# Altium PCB MAX96717_COUPON_V2.PcbDoc
Units mm, origin at the board's own origin, x right, y up, seen from the top; angles counter-clockwise.
Board outline 43 x 42 mm, 4 copper layers (Top Layer, Layer 1, Layer 2, Bottom Layer), stack 1.586 mm thick; 67 components, 47 nets, 220 pads, 89 vias.
Unrouted connection lines stored in the file: 6.
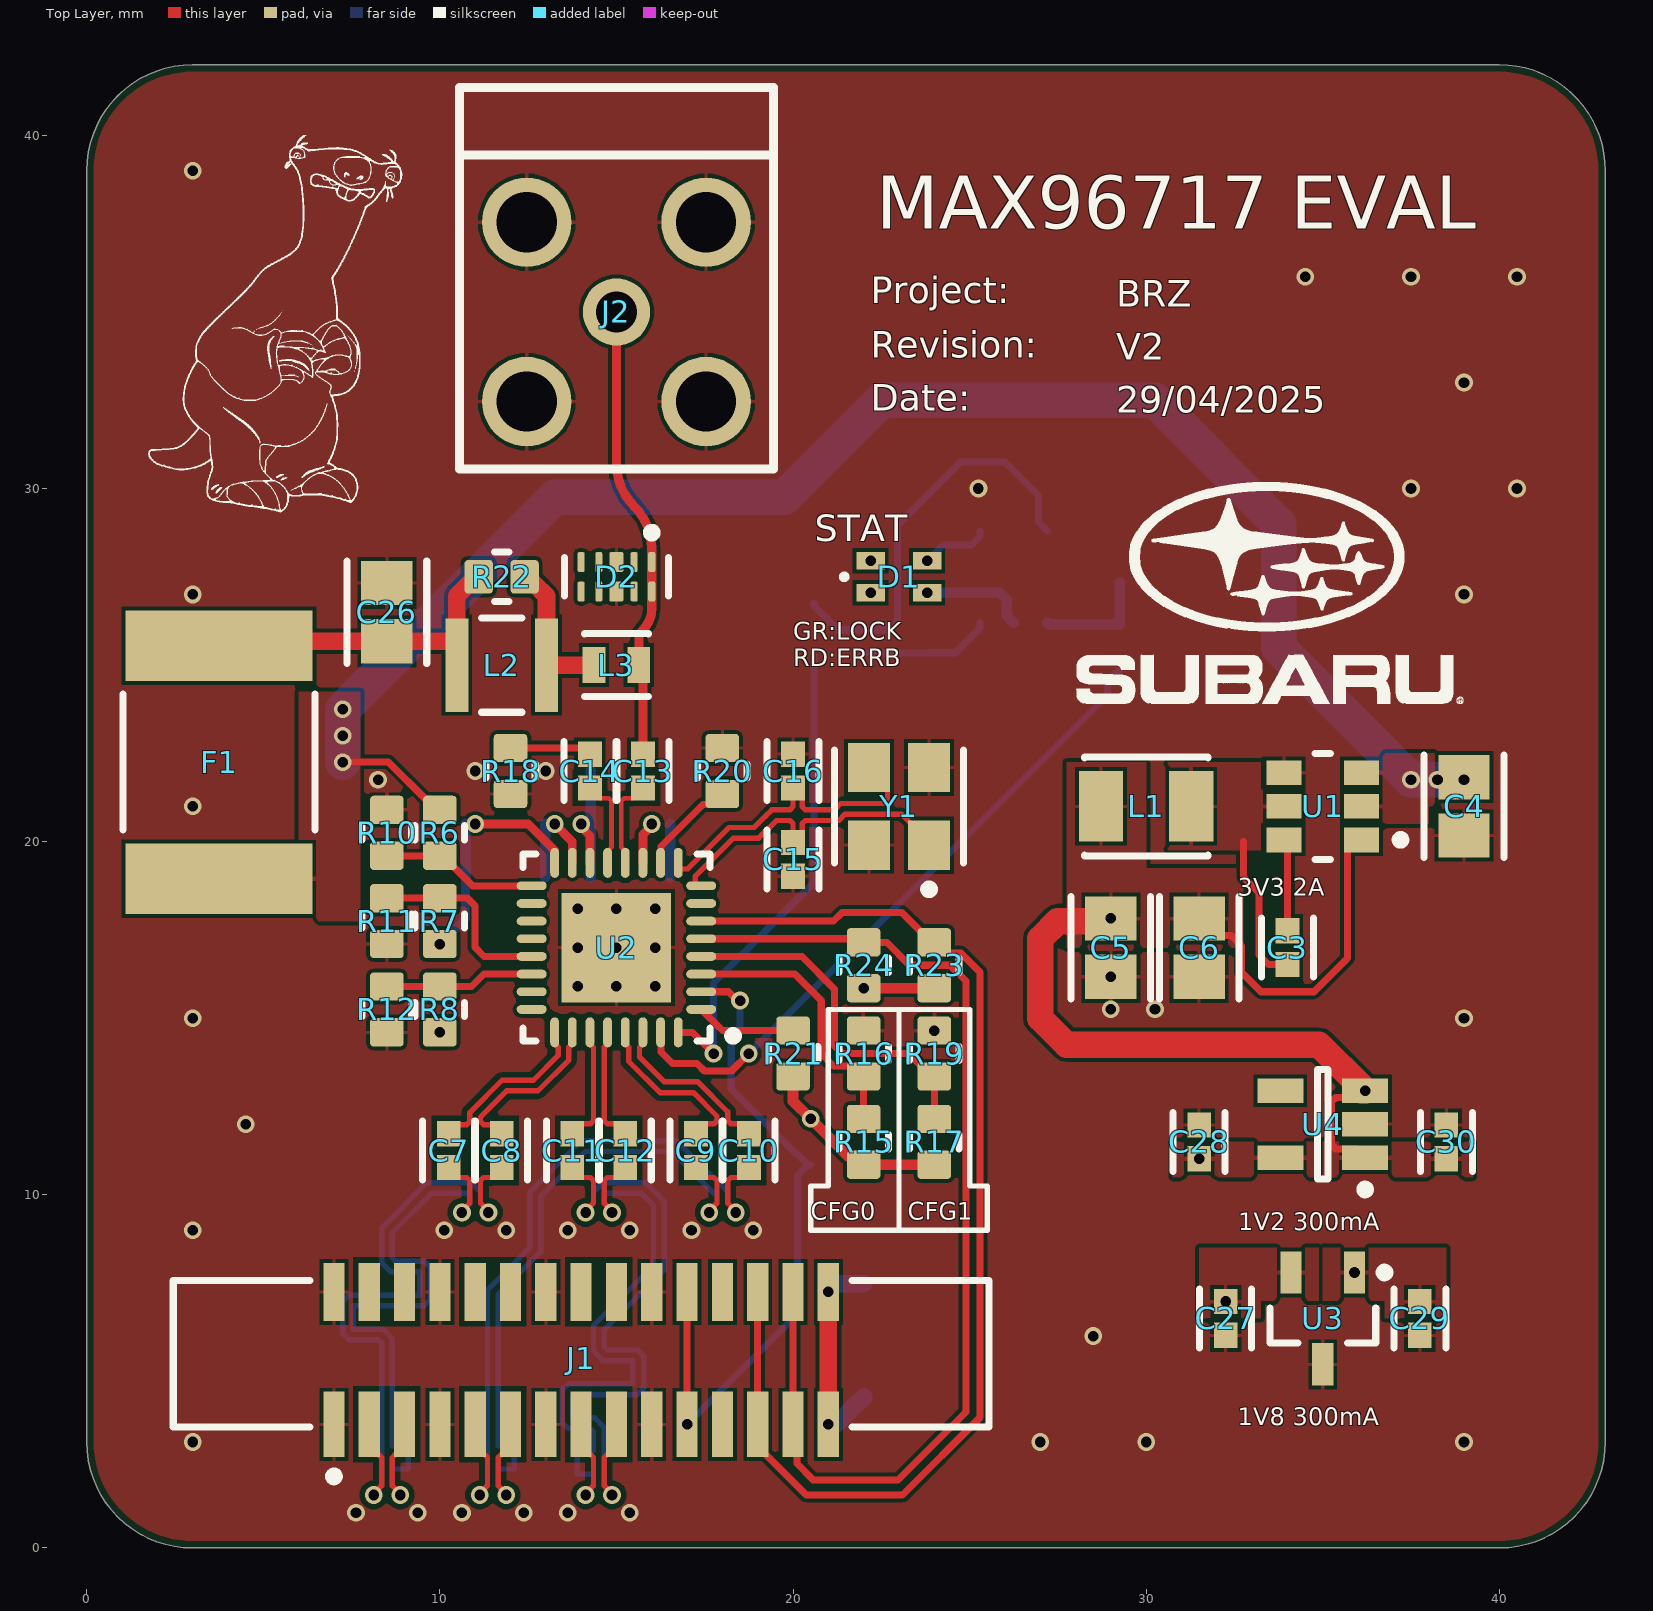
[diagram p0: Top Layer view]
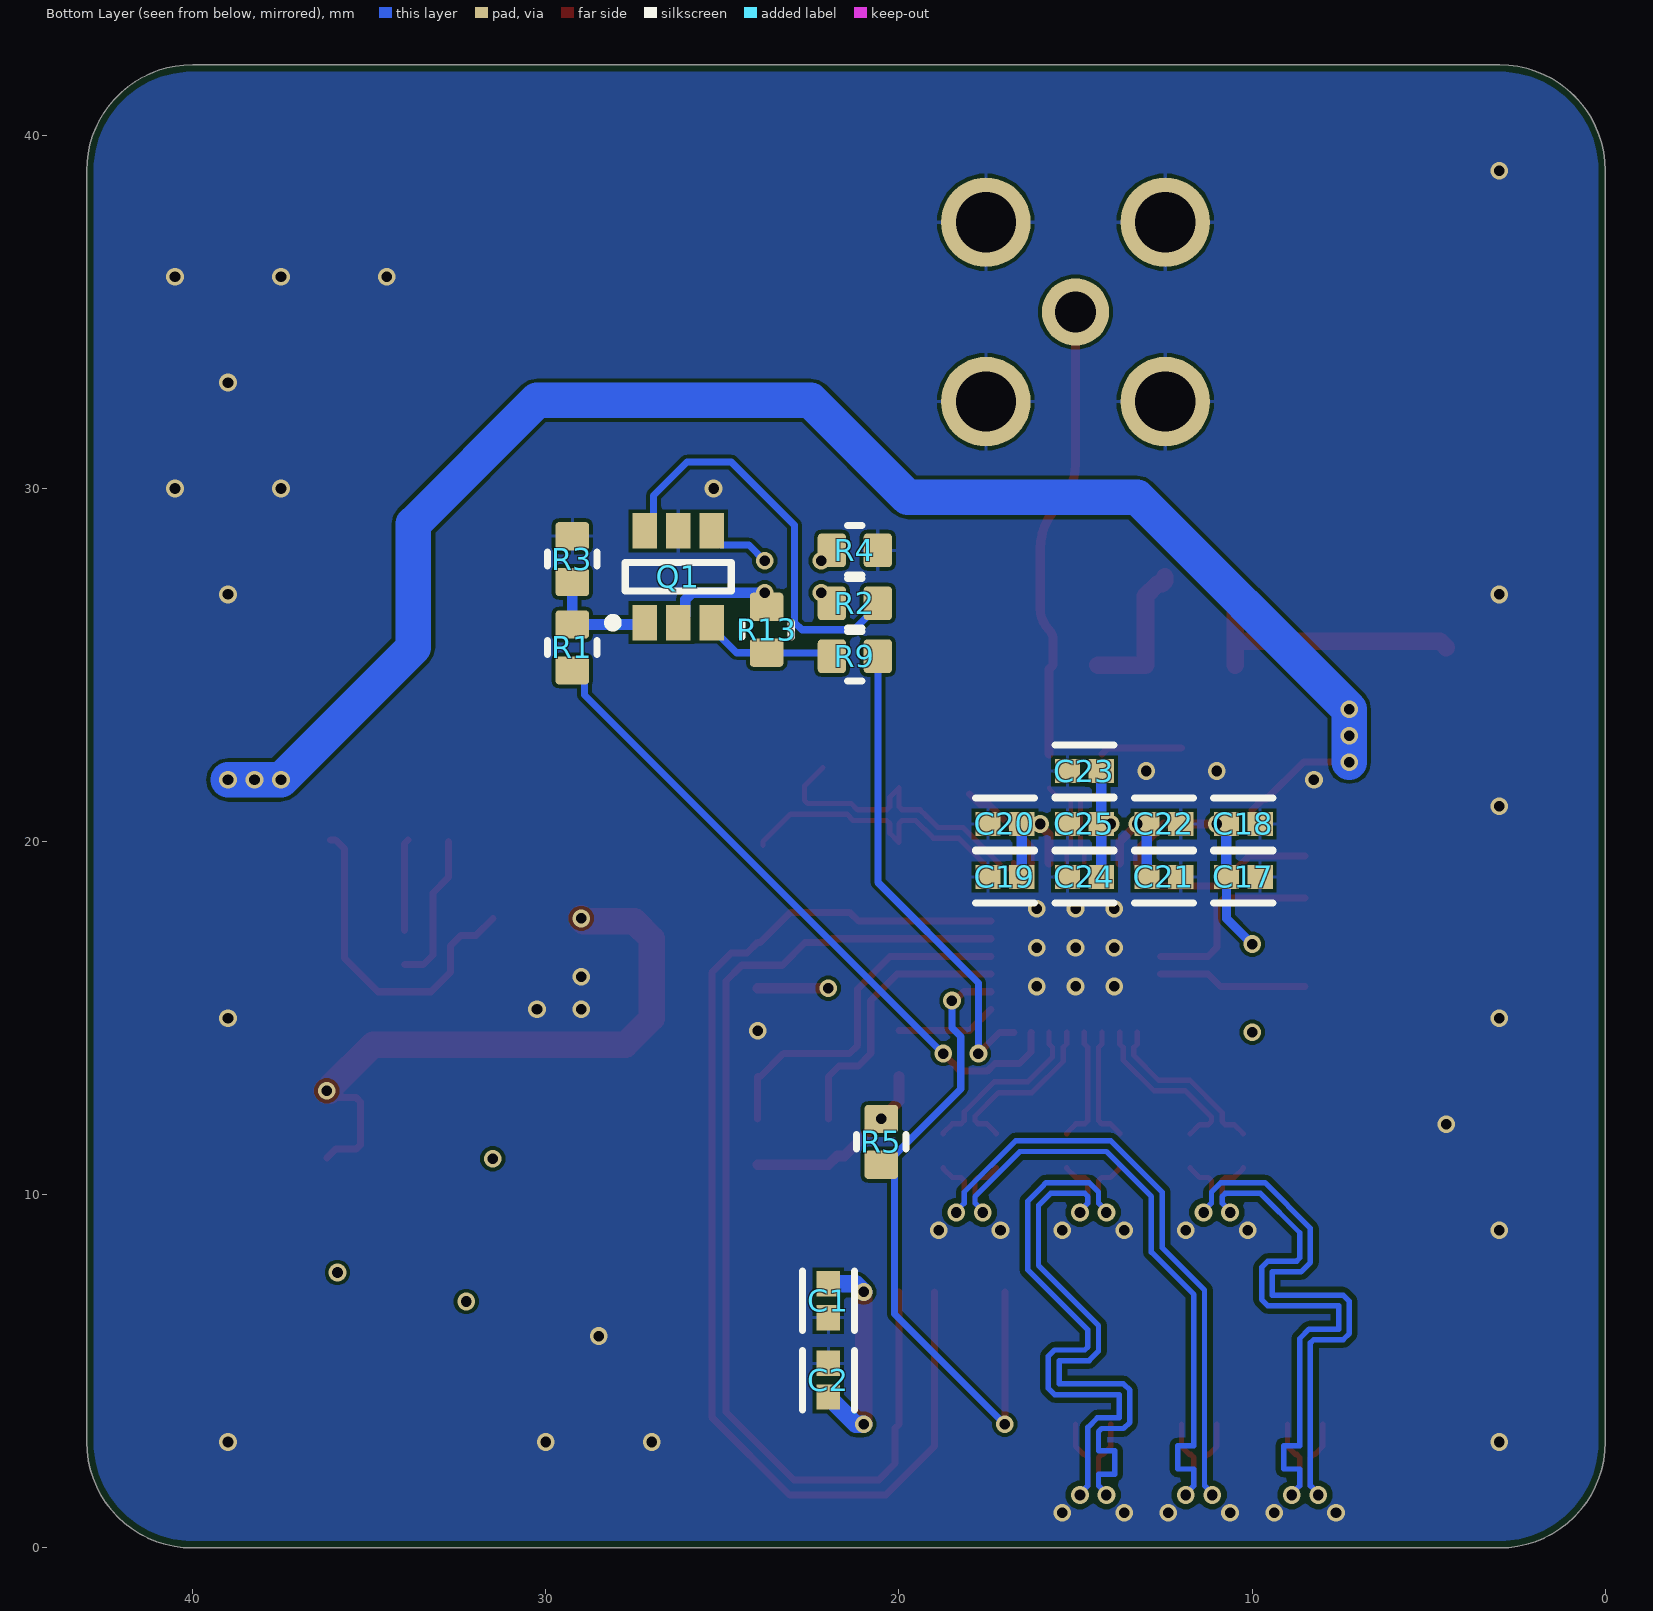
[diagram p1: Bottom Layer view, seen from below]
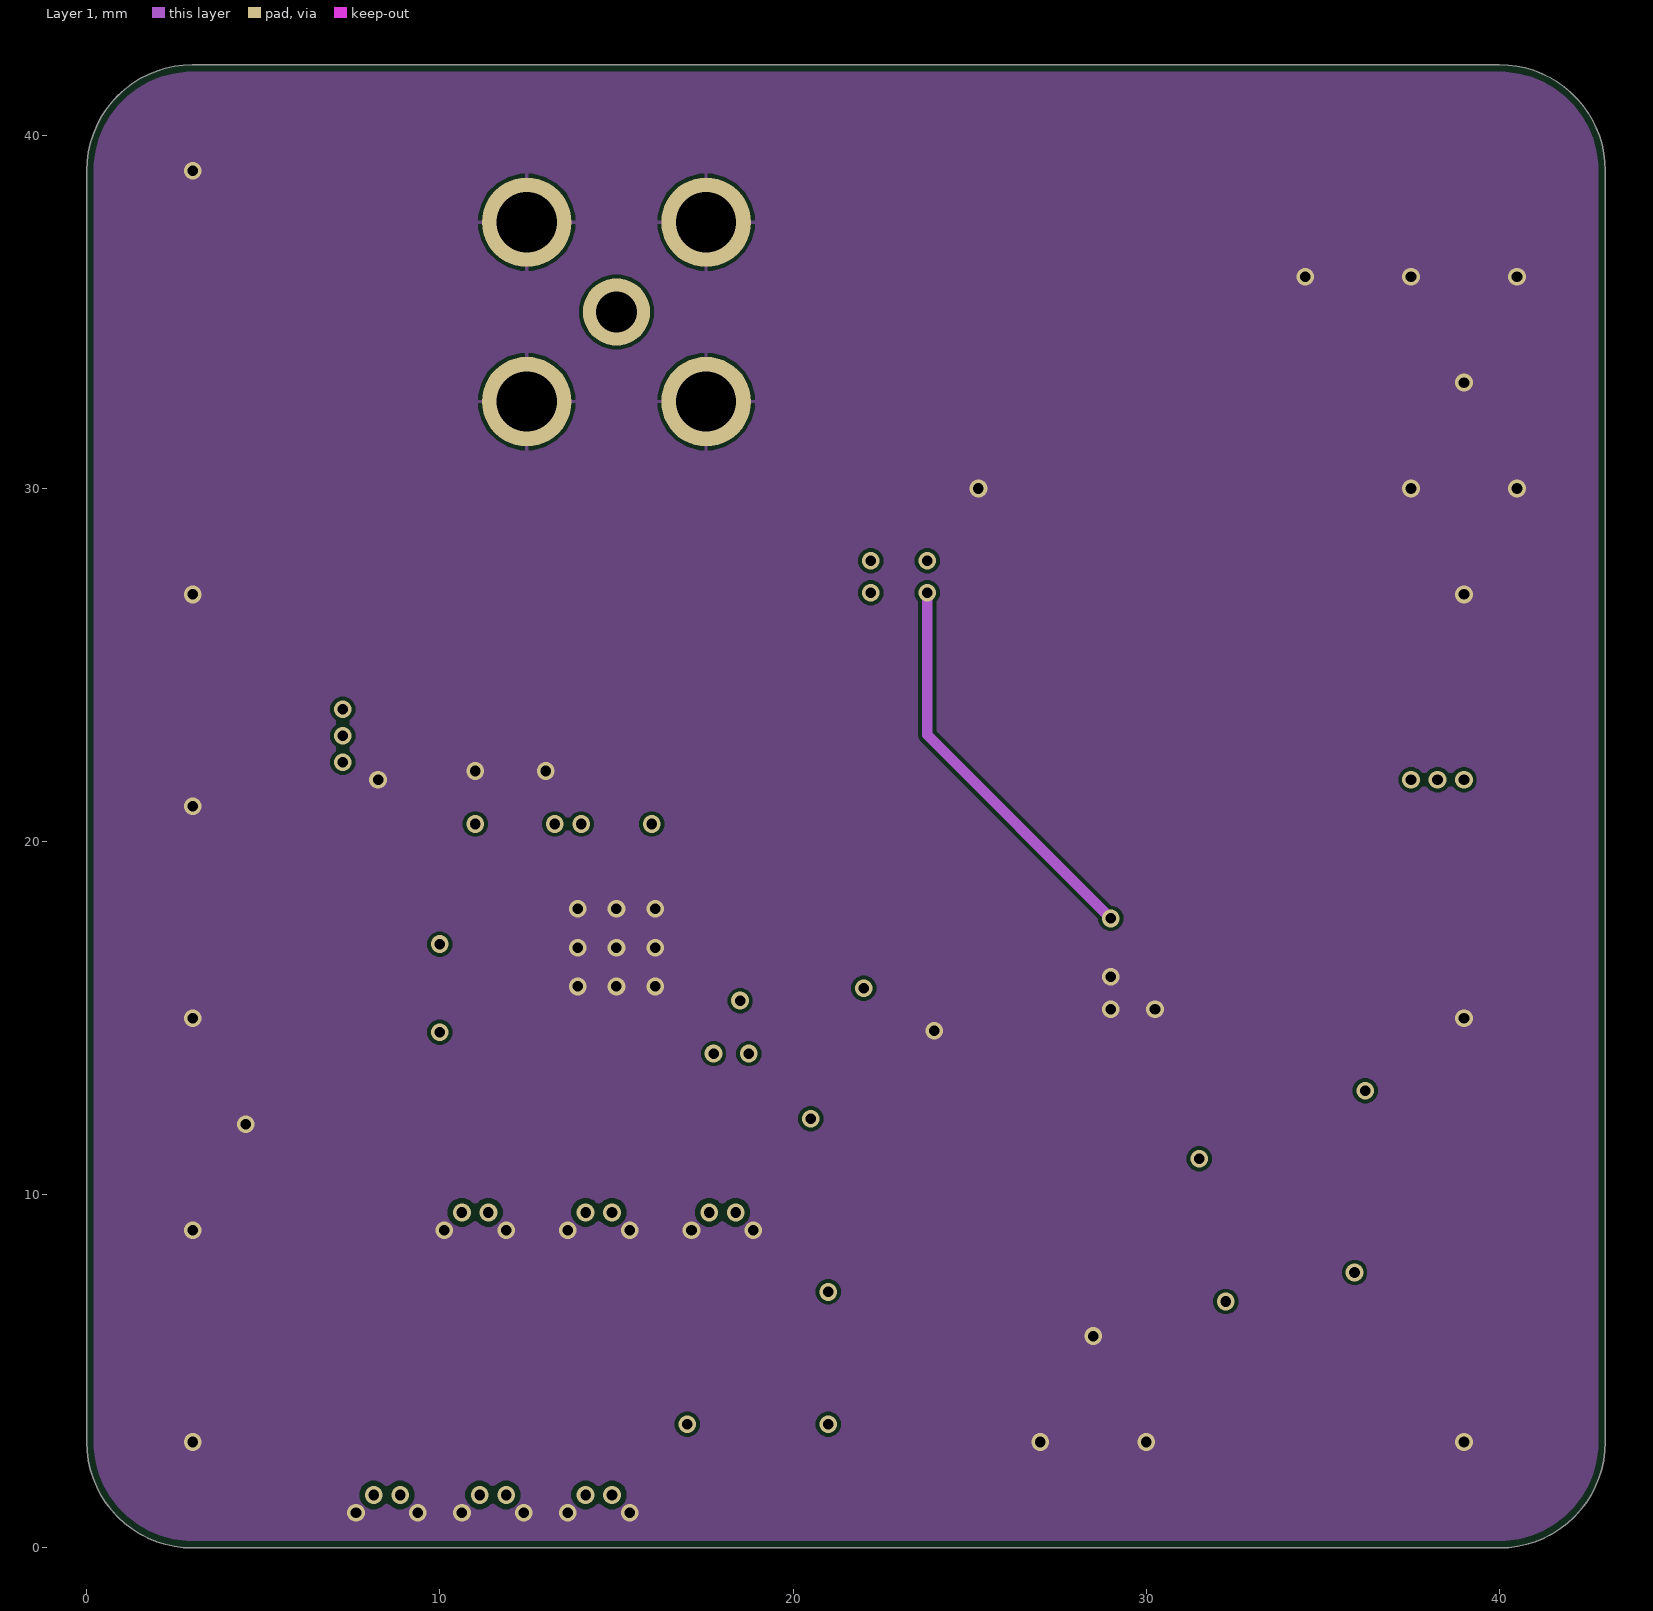
[diagram p2: Layer 1]
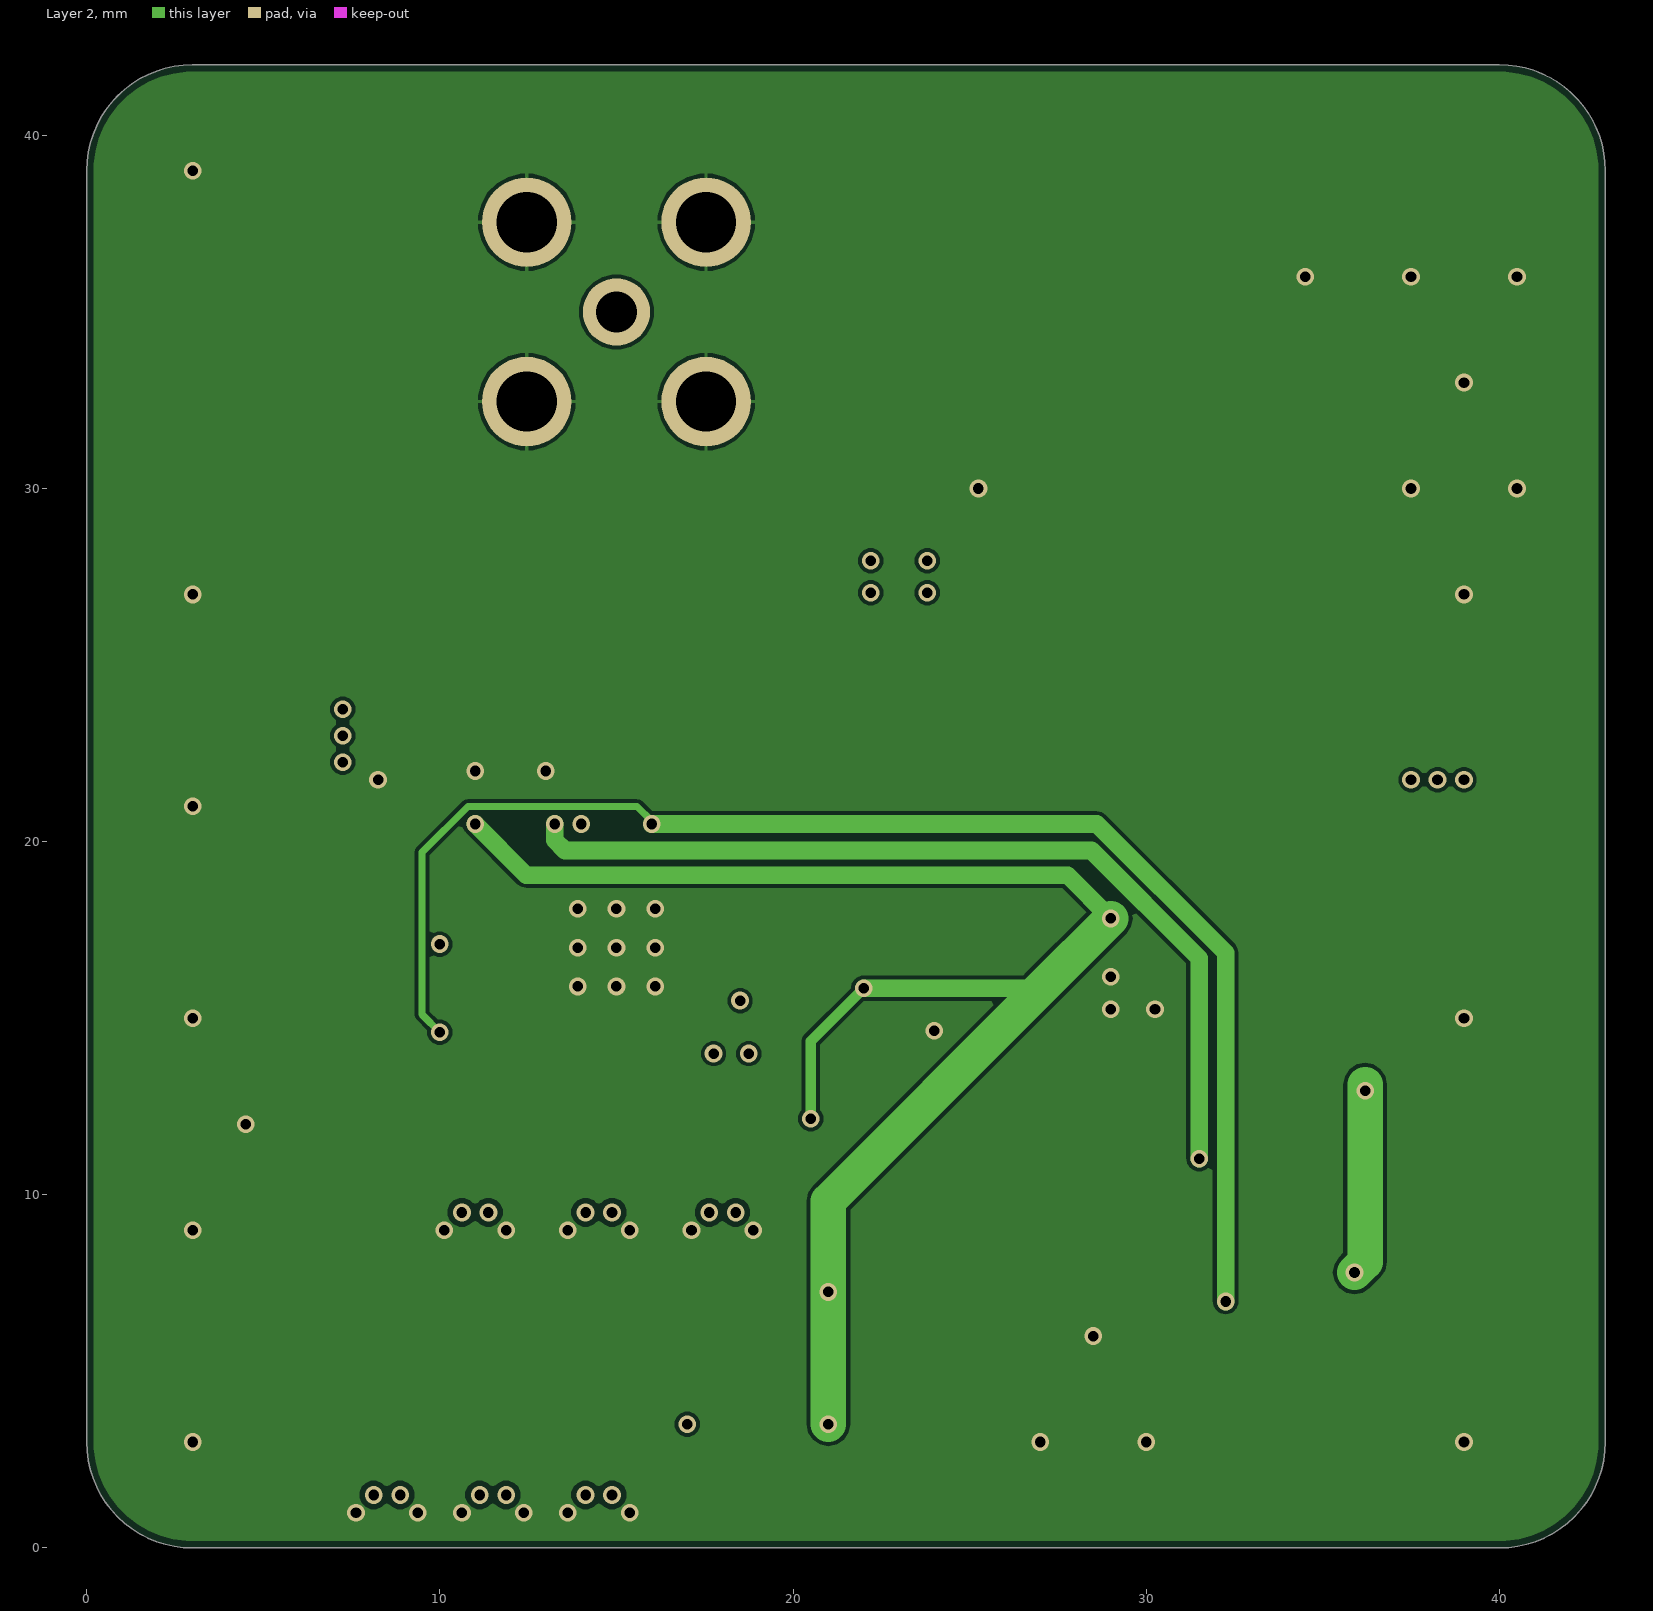
[diagram p3: Layer 2]
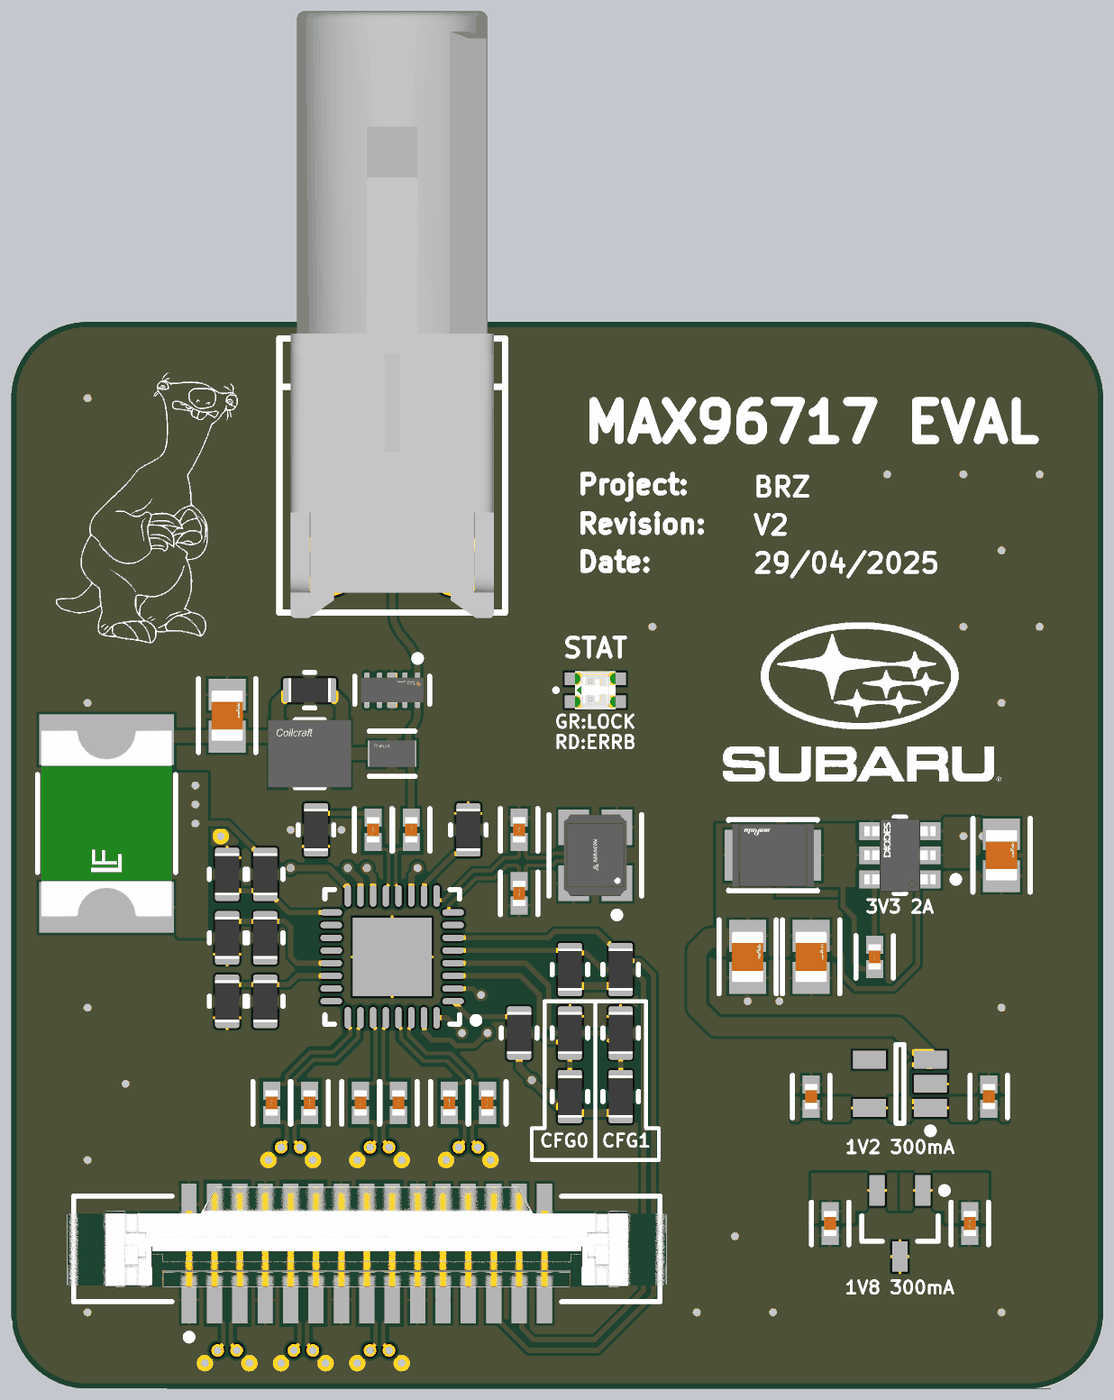
[diagram p4: 3D render of the assembled board from above, using the file's embedded part models]
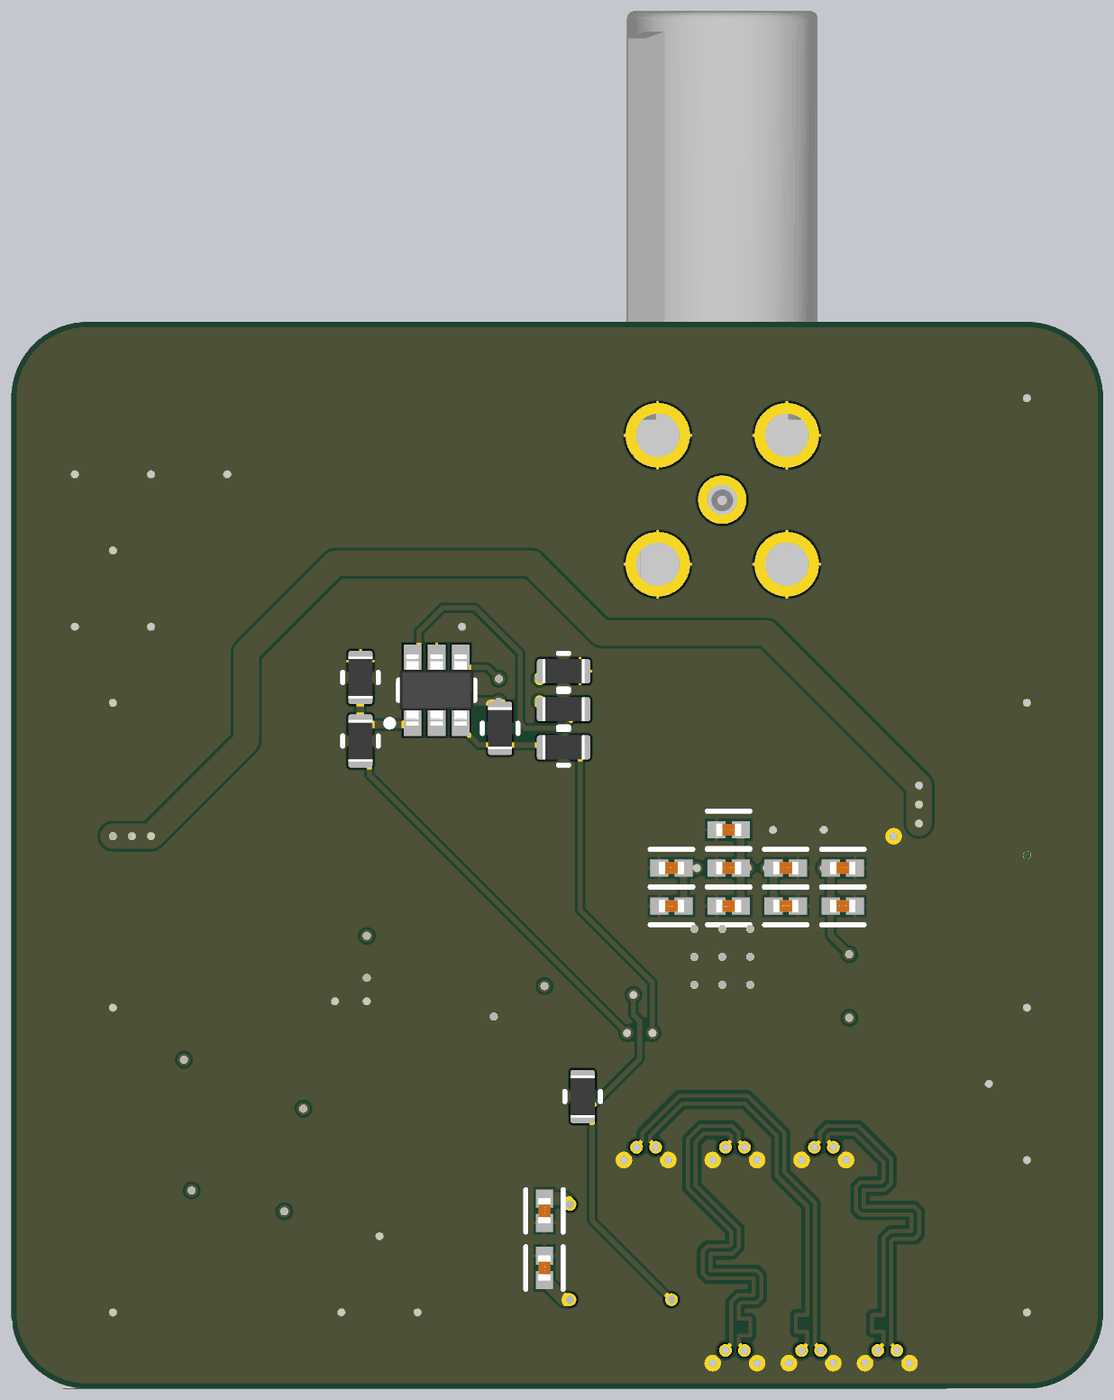
[diagram p5: 3D render of the assembled board from below, using the file's embedded part models]

## Layer stack, top to bottom
Top Solder: solder mask 0.0102, Solder Resist, Dk 3.5
Top Layer: signal copper 0.035
Dielectric 2: prepreg 0.2104, PP-006, Dk 4.1
Layer 1: signal copper 0.0152
Dielectric 1: dielectric 1.065, FR-4, Dk 4.8
Layer 2: signal copper 0.0152
Dielectric 3: prepreg 0.2104, PP-006, Dk 4.1
Bottom Layer: signal copper 0.035
Bottom Solder: solder mask 0.0102, Solder Resist, Dk 3.5

## Board outline
0,3 0,39 cw(c3,39) 3,42 40,42 cw(c40,39) 43,39 43,3 cw(c40,3) 40,0 3,0 cw(c3,3)

## Design rules (kind name [scope] priority, off if disabled: settings)
BoardOutlineClearance [All] p1: gap=0.2 ignorepadtopadclearanceinfootprint=FALSE
Clearance [InDifferentialPairClass('100DIFF') or InDifferentialPairClass('CSI') or InDifferentialPairClass('PRECSI')] p1: gap=0.15 ignorepadtopadclearanceinfootprint=FALSE
Clearance Clearance_1 [All] p2: gap=0.102 ignorepadtopadclearanceinfootprint=TRUE
ComponentClearance [All] p1: gap=0.102 collisioncheckmode=3 verticalgap=0.102 showdistances=TRUE
DiffPairsRouting 100DIFF [InDifferentialPairClass('CSI') OR InDifferentialPairClass('PRECSI') OR InDifferentialPairClass('100DIFF') or InDifferentialPair('X25')] p1: maxlimit=0.15 minlimit=0.127 mostfreqgap=0.15 toplayer_mingap=0.15 toplayer_minwidth=0.152 toplayer_maxwidth=0.152 toplayer_prefwidth=0.152 midlayer1_maxgap=0.127 midlayer1_prefgap=0.127 midlayer1_minwidth=0.096 midlayer1_maxwidth=0.096 midlayer1_prefwidth=0.096 midlayer2_maxgap=0.127 midlayer2_prefgap=0.127 midlayer2_minwidth=0.096 midlayer2_maxwidth=0.096 midlayer2_prefwidth=0.096 bottomlayer_mingap=0.15 bottomlayer_minwidth=0.152 bottomlayer_maxwidth=0.152 bottomlayer_prefwidth=0.152 impedanceprofiledriven=TRUE impedanceprofileid={3A5E3B2F-6379-49CF-B6F8-0CE5CCFD662C} impedanceprofilevalue=100.000000 maxuncoupledlength=12.7
DiffPairsRouting [All] p2: maxlimit=0.102 minlimit=0.102 mostfreqgap=0.102 toplayer_minwidth=0.102 toplayer_maxwidth=1816.048 toplayer_prefwidth=0.102 midlayer1_minwidth=0.102 midlayer1_maxwidth=1816.048 midlayer1_prefwidth=0.102 midlayer2_minwidth=0.102 midlayer2_maxwidth=1816.048 midlayer2_prefwidth=0.102 bottomlayer_minwidth=0.102 bottomlayer_maxwidth=1816.048 bottomlayer_prefwidth=0.102 maxuncoupledlength=12.7
Height [All] p1: minheight=0 maxheight=1816.048 prefheight=12.7
HoleSize [All] p1: absolutevalues=TRUE maxlimit=6.3 minlimit=0.2 maxpercent=80.000 minpercent=20.000
HoleToHoleClearance [All] p1: gap=0.25 allowstackedmicrovias=FALSE
MatchedLengths PRECSI_INTER [InDifferentialPairClass('PRECSI')] p1: tolerance=25.4 checknetsindiffpair=FALSE checkdiffpairvsdiffpair=TRUE checkxsignals=TRUE checkothers=TRUE usedelayunits=TRUE delaytolerance=10.000000
MatchedLengths CSI_INTER [InDifferentialPairClass('CSI')] p2: tolerance=25.4 checknetsindiffpair=FALSE checkdiffpairvsdiffpair=TRUE checkxsignals=TRUE checkothers=TRUE usedelayunits=TRUE delaytolerance=10.000000
MatchedLengths CSI_INTRA [InDifferentialPairClass('CSI') OR InDifferentialPairClass('PRECSI') OR InDifferentialPairClass('100DIFF')] p3: tolerance=25.4 checknetsindiffpair=TRUE checkdiffpairvsdiffpair=FALSE checkxsignals=FALSE checkothers=FALSE usedelayunits=TRUE delaytolerance=1.000000
MinimumAnnularRing [All] p1: minimumring=0.076
MinimumSolderMaskSliver [All] p1: minsoldermaskwidth=0
PlaneClearance [All] p1: clearance=0.102
PlaneConnect PlaneConnectPowerPads [InPadClass('PowerPads')] p1: planeconnectstyle=Direct reliefexpansion=0.508 reliefentries=4 reliefconductorwidth=0.254 reliefairgap=0.254
PlaneConnect [All] p2: pad.planeconnectstyle=Relief pad.reliefexpansion=0.3 pad.reliefentries=4 pad.reliefconductorwidth=0.102 pad.reliefairgap=0.102 via.planeconnectstyle=Direct via.reliefexpansion=0.3 via.reliefentries=4 via.reliefconductorwidth=0.127 via.reliefairgap=0.127
PolygonConnect PolygonConnectPowerPads [All vs (InPadClass('PowerPads'))] p1: connectstyle=Direct reliefconductorwidth=0.254 reliefentries=4 polygonreliefangle="90 Angle" airgapwidth=0.254
PolygonConnect [All] p2: thpad.connectstyle=Relief thpad.reliefconductorwidth=0.102 thpad.reliefentries=4 thpad.polygonreliefangle="90 Angle" thpad.airgapwidth=0.102 smdpad.connectstyle=Relief smdpad.reliefconductorwidth=0.102 smdpad.reliefentries=4 smdpad.polygonreliefangle="90 Angle" smdpad.airgapwidth=0.102 via.connectstyle=Direct via.reliefconductorwidth=0.127 via.reliefentries=4 via.polygonreliefangle="90 Angle" via.airgapwidth=0.127
RoutingVias [All] p1: holewidth=0.2 width=0.45 viastyle="Through Hole" minholewidth=0.2 minwidth=0.45 maxholewidth=6.3 maxwidth=6.55
SilkToSilkClearance [All] p1: silktosilkclearance=0
SilkToSolderMaskClearance [IsPad] p1: minsilkscreentomaskgap=0.102 clearancetoexposedcopper=TRUE
SolderMaskExpansion [All] p1: expansion=0.075 istentingtop=FALSE
SupplyNets "Schematic Supply Nets_4" [InNet('GND')] p1: voltage=0.000
SupplyNets "Schematic Supply Nets_3" [InNet('1V2')] p2: voltage=0.000
SupplyNets "Schematic Supply Nets_2" [InNet('PoC_PWR')] p3: voltage=0.000
SupplyNets "Schematic Supply Nets_1" [InNet('3V3')] p4: voltage=0.000
SupplyNets "Schematic Supply Nets" [InNet('1V8')] p5: voltage=0.000
Width GMSL [InNetClass('50SINGLE')] p1: maxlimit=0.261 minlimit=0.187 preferedwidth=0.261 toplayer_minwidth=0.261 midlayer1_maxwidth=0.187 midlayer1_prefwidth=0.187 midlayer2_maxwidth=0.187 midlayer2_prefwidth=0.187 bottomlayer_minwidth=0.261 impedanceprofiledriven=TRUE impedanceprofileid={45AACF6D-5EF4-4BDD-8390-5E17DF0A3D42} impedanceprofilevalue=50.000000 minimp=50.000000 maximp=50.000000 favimp=50.000000
Width [All] p2: maxlimit=1816.048 minlimit=0.102 preferedwidth=0.102
20 further rules are at their usual default settings.

## Classes and differential pairs
differential pair class PRECSI: CSI_CLK CSI_D0 CSI_D1
differential pair class CSI: CLK DA0 DA1
differential pair class 100DIFF: SIO
net class 50SINGLE: PoC_TAP
component class MAX96717_COUPON_V2: C1 C2 D1 J1 J2 Q1 R1 R2 R3 R4 R5 R6 R7 R8 R9 R10 R11 R12 R13 R23 R24
component class GMSL_SERIALIZER: C7 C8 C9 C10 C11 C12 C13 C14 C15 C16 C17 C18 C19 C20 C21 C22 C23 C24 C25 C26 C27 C28 C29 C30 D2 F1 L2 L3 R15 R16 R17 R18 R19 R20 R21 R22 U2 U3 U4 Y1
component class 3V3_REG: C3 C4 C5 C6 L1 U1
differential pair X25: +X25_P -X25_N
differential pair SIO: +SIO_P -SIO_N
differential pair DA1: +DA1_P -DA1_N
differential pair DA0: +DA0_P -DA0_N
differential pair CSI_D1: +CSI_D1_P -CSI_D1_N
differential pair CSI_D0: +CSI_D0_P -CSI_D0_N
differential pair CSI_CLK: +CSI_CLK_P -CSI_CLK_N
differential pair CLK: +CLK_P -CLK_N

## Components (designator, comment, footprint, x,y, rotation, side; value= is the part's Value field where it differs from the comment)
C1 "100n" FP-0402-L_1_0_0_05-W_0_5-IPC_A 22,7 r270 bottom
C2 "10u" FP-0402-L_1_0_0_05-W_0_5-IPC_A 22,4.75 r90 bottom
C3 "100n" FP-0402-L_1_0_0_05-W_0_5-IPC_A 34,17 r270 top
C4 "GRM21BR61E226ME44L" FP-GRM21B-0_2-e0_2_0_7-IPC_B 39,21 r90 top
C5 "GRM21BR61E226ME44L" FP-GRM21B-0_2-e0_2_0_7-IPC_B 29,17 r90 top
C6 "GRM21BR61E226ME44L" FP-GRM21B-0_2-e0_2_0_7-IPC_B 31.5,17 r90 top
C7 "100n" FP-0402-L_1_0_0_05-W_0_5-IPC_A 10.25,11.25 r90 top
C8 "100n" FP-0402-L_1_0_0_05-W_0_5-IPC_A 11.75,11.25 r90 top
C9 "100n" FP-0402-L_1_0_0_05-W_0_5-IPC_A 17.25,11.25 r90 top
C10 "100n" FP-0402-L_1_0_0_05-W_0_5-IPC_A 18.75,11.25 r90 top
C11 "100n" FP-0402-L_1_0_0_05-W_0_5-IPC_A 13.75,11.25 r90 top
C12 "100n" FP-0402-L_1_0_0_05-W_0_5-IPC_A 15.25,11.25 r90 top
C13 "100n" FP-0402-L_1_0_0_05-W_0_5-IPC_A 15.75,22 r90 top
C14 "100n" FP-0402-L_1_0_0_05-W_0_5-IPC_A 14.25,22 r90 top
C15 "30p" FP-0402-L_1_0_0_05-W_0_5-IPC_A 20,19.5 r270 top
C16 "30p" FP-0402-L_1_0_0_05-W_0_5-IPC_A 20,22 r90 top
C17 "100n" FP-0402-L_1_0_0_05-W_0_5-IPC_A 10.25,19 r180 bottom
C18 "10n" FP-0402-L_1_0_0_05-W_0_5-IPC_A 10.25,20.5 r180 bottom
C19 "100n" FP-0402-L_1_0_0_05-W_0_5-IPC_A 17,19 r0 bottom
C20 "10n" FP-0402-L_1_0_0_05-W_0_5-IPC_A 17,20.5 r0 bottom
C21 "100n" FP-0402-L_1_0_0_05-W_0_5-IPC_A 12.5,19 r180 bottom
C22 "10n" FP-0402-L_1_0_0_05-W_0_5-IPC_A 12.5,20.5 r180 bottom
C23 "10u" FP-0402-L_1_0_0_05-W_0_5-IPC_A 14.75,22 r0 bottom
C24 "10u" FP-0402-L_1_0_0_05-W_0_5-IPC_A 14.75,19 r0 bottom
C25 "100n" FP-0402-L_1_0_0_05-W_0_5-IPC_A 14.75,20.5 r0 bottom
C26 "GRM21BR61E226ME44L" FP-GRM21B-0_2-e0_2_0_7-IPC_B 8.5,26.5 r90 top
C27 "10u" FP-0402-L_1_0_0_05-W_0_5-IPC_A 32.25,6.5 r270 top
C28 "10u" FP-0402-L_1_0_0_05-W_0_5-IPC_A 31.5,11.5 r90 top
C29 "100n" FP-0402-L_1_0_0_05-W_0_5-IPC_A 37.75,6.5 r270 top
C30 "100n" FP-0402-L_1_0_0_05-W_0_5-IPC_A 38.5,11.5 r90 top
D1 "150066RG54050" WL-SBCD_0606 23,27.5 r90 top
D2 "ESD204DQAR" FP-DQA0010A-MFG 15,27.5 r270 top value=0.55pF
F1 "2920L050DR" FP-2920L050DR-MFG 3.75,22.25 r90 top
J1 "1-1734248-5" FP-1-1734248-5-MFG 14,5.5 r180 top
J2 "FA1-NDRP-PCB-8" FA1-NDRP-PCB-8-Footprint-1 15,35 r0 top
L1 "LQH32PN4R7NN0L" FP-LQH32PB_N0-MFG 30,21 r180 top
L2 "ADL32VHC-220M" FP-1210POC-MFG 11.75,25 r0 top value=22uH
L3 "PFL1609-561MEW" FP-PFL1609-MFG 15,25 r0 top value=0.56uH
Q1 "FDC6327C" FAIR-SOT23-6_V 26.25,27.5 r90 bottom
R1 "1k" R0603B 29.25,25.5 r270 bottom
R2 "330" R0603B 21.25,26.75 r0 bottom
R3 "100k" R0603B 29.25,28 r90 bottom
R4 "330" R0603B 21.25,28.25 r0 bottom
R5 "100k" R0603B 20.5,11.5 r90 bottom
R6 "100k" R0603B 10,20.25 r90 top
R7 "100k" R0603B 10,17.75 r270 top
R8 "80.6k" R0603B 10,15.25 r270 top value=100k
R9 "1k" R0603B 21.25,25.25 r0 bottom
R10 "7.5k" R0603B 8.5,20.25 r270 top value=100k
R11 "51k" R0603B 8.5,17.75 r90 top value=100k
R12 "100k" R0603B 8.5,15.25 r90 top
R13 "100k" R0603B 23.75,26 r270 bottom
R15 "68.1k" R0603B 22,11.5 r270 top value=100k
R16 "32.4k" R0603B 22,14 r270 top value=100k
R17 "44.2k" R0603B 24,11.5 r270 top value=100k
R18 "49.9" R0603B 12,22 r90 top value=100k
R19 "56.2k" R0603B 24,14 r270 top value=100k
R20 "402" R0603B 18,22 r270 top value=100k
R21 "100k" R0603B 20,14 r270 top
R22 "5.1k" R0603B 11.75,27.5 r180 top value=100k
R23 "100k" R0603B 24,16.5 r270 top
R24 "100k" R0603B 22,16.5 r270 top
U1 "AP63203WU-7" FP-TSOT26-MFG 35,21 r180 top
U2 "MAX96717FGTJ/VY+T" QFN50P500X500X80_HS-33N 15,17 r180 top
U3 "AP7375-18SA-7" AP7375-18SA-7-Footprint-1 35,6.5 r270 top
U4 "MCP1802T-1202I/OT" SOT-23-OT5_M 35,12 r180 top
Y1 "ABM8G-25.000MHZ-18-D2Y-T" FP-ABM8G-MFG 23,21 r90 top

## Footprints (in the part's own frame and the unit in brackets; to place one, negate y for a bottom-side part, rotate by r counter-clockwise, add the part's x,y. Pads: shape width x height; smd on the part's side, far side on the other; paste and mask are expansions set on the pad)
AP7375-18SA-7-Footprint-1 [mm]
  rect 1.2x0.6 smd: 1(-1.3,0.9) 2(-1.3,-0.9) 3(1.3,0)
  silkscreen extent -1.42,-1.5 0.7,1.88, body extent -0.7,-1.5 0.7,1.5, height 1.1
FA1-NDRP-PCB-8-Footprint-1 [mil]
  round 75 hole 46: 1(0,0)
  round 100 hole 67: 2(-100,-100) 2(-100,100) 2(100,-100) 2(100,100)
  silkscreen extent -175,-175 175,250, body extent -157,-183 157,758, height 421
FAIR-SOT23-6_V [mm] "SOT23, 6-Leads, Body 2.9x1.6mm, Pitch 0.95mm"
  rect 1x0.7 smd: 1(-1.3,0.95) 2(-1.3,0) 3(-1.3,-0.95) 4(1.3,-0.95) 5(1.3,0) 6(1.3,0.95)
  silkscreen extent -1.42,-1.5 0.4,1.98, body extent -1.4,-1.45 1.4,1.45, height 1.45
FP-1-1734248-5-MFG [mm]
  rect 0.6x1.65 smd paste+0 mask+0: 1(7,-1.75) 2(6,-1.75) 3(5,-1.75) 4(4,-1.75) 5(3,-1.75) 6(2,-1.75) 7(1,-1.75) 8(0,-1.75) 9(-1,-1.75) 10(-2,-1.75) 11(-3,-1.75) 12(-4,-1.75) 13(-5,-1.75) 14(-6,-1.75) 15(-7,-1.75)
  rect 0.6x1.85 smd paste+0 mask+0: 1(7,2) 2(6,2) 3(5,2) 4(4,2) 5(3,2) 6(2,2) 7(1,2) 8(0,2) 9(-1,2) 10(-2,2) 11(-3,2) 12(-4,2) 13(-5,2) 14(-6,2) 15(-7,2)
  silkscreen extent -11.55,-2.07 11.55,3.6, body extent -11.65,-2.67 11.65,3.02, height 0.25
FP-0402-L_1_0_0_05-W_0_5-IPC_A [mm]
  rect 0.715x0.672 smd paste+0 mask+0: 1(-0.479,0) 2(0.479,0)
  silkscreen extent -0.84,-0.74 0.84,0.74, body extent -0.5,-0.25 0.5,0.25, height 0.55
FP-1210POC-MFG [mm]
  rect 0.65x2.65 smd paste+0 mask+0: 1(-1.27,0) 2(1.27,0)
  silkscreen extent -0.57,-1.34 0.57,1.34, body extent -1.75,-1.44 1.75,1.44, height 0.25
FP-2920L050DR-MFG [mm]
  rect 2x5.3 smd paste+0 mask+0: 1(-3.3,0) 2(3.3,0)
  silkscreen extent -1.92,-2.72 1.92,2.72, body extent -4.4,-2.82 4.4,2.82, height 0.25
FP-ABM8G-MFG [mm]
  rect 1.4x1.2 smd paste+0 mask+0: 1(-1.1,-0.85) 2(1.1,-0.85) 3(1.1,0.85) 4(-1.1,0.85)
  silkscreen extent -2.47,-1.83 1.6,1.83, body extent -1.9,-1.55 1.9,1.55, height 0.25
FP-DQA0010A-MFG [mm]
  rrect50% 0.565x0.2 smd paste+0 mask+0: 1(-0.417,1) 2(-0.417,0.5) 4(-0.417,-0.5) 5(-0.417,-1) 6(0.417,-1) 7(0.417,-0.5) 9(0.417,0.5) 10(0.417,1)
  rrect25% 0.565x0.4 smd paste-1000 mask+0: 3(-0.417,0) 8(0.417,0)
  silkscreen extent -1.37,-1.48 0.55,1.48, body extent -0.8,-1.4 0.8,1.4, height 0.25
FP-GRM21B-0_2-e0_2_0_7-IPC_B [mm]
  rect 1.255x1.456 smd paste+0 mask+0: 1(-0.826,0) 2(0.826,0)
  silkscreen extent -1.45,-1.13 1.45,1.13, body extent -1.7,-0.98 1.7,0.98, height 0.25
FP-LQH32PB_N0-MFG [mm]
  rect 1.25x2 smd paste+0 mask+0: 1(-1.275,0) 2(1.275,0)
  silkscreen extent -1.75,-1.4 1.75,1.4, body extent -2,-1.5 2,1.5, height 0.25
FP-PFL1609-MFG [mm]
  rect 0.64x1.02 smd paste+0 mask+0: 1(-0.635,0) 2(0.635,0)
  silkscreen extent -0.9,-0.89 0.9,0.89, body extent -1.05,-0.64 1.05,0.64, height 0.25
FP-TSOT26-MFG [mm]
  rect 1x0.7 smd paste+0 mask+0: 1(-1.099,0.95) 2(-1.099,0) 3(-1.099,-0.95) 4(1.099,-0.95) 5(1.099,0) 6(1.099,0.95)
  silkscreen extent -2.33,-1.5 0.22,1.5, body extent -1.7,-1.6 1.7,1.6, height 0.25
QFN50P500X500X80_HS-33N [mm] "QFN, 32-Leads, Body 5.00x5.00mm, Pitch 0.50mm, Thermal Pad 3.10x3.10mm, IPC Medium Density"
  oval 0.85x0.25 smd: 1(-2.4,1.75) 2(-2.4,1.25) 3(-2.4,0.75) 4(-2.4,0.25) 5(-2.4,-0.25) 6(-2.4,-0.75) 7(-2.4,-1.25) 8(-2.4,-1.75) 17(2.4,-1.75) 18(2.4,-1.25) 19(2.4,-0.75) 20(2.4,-0.25) 21(2.4,0.25) 22(2.4,0.75) 23(2.4,1.25) 24(2.4,1.75)
  oval 0.25x0.85 smd: 9(-1.75,-2.4) 10(-1.25,-2.4) 11(-0.75,-2.4) 12(-0.25,-2.4) 13(0.25,-2.4) 14(0.75,-2.4) 15(1.25,-2.4) 16(1.75,-2.4) 25(1.75,2.4) 26(1.25,2.4) 27(0.75,2.4) 28(0.25,2.4) 29(-0.25,2.4) 30(-0.75,2.4) 31(-1.25,2.4) 32(-1.75,2.4)
  rect 3.1x3.1 smd: 33(0,0)
  silkscreen extent -3.43,-2.65 2.65,2.65, body extent -2.5,-2.5 2.5,2.5, height 0.8
R0603B [mm] "Chip Resistor, 0603, 2-Leads, Body 1.58x0.85mm, IPC Medium Density"
  rrect25% 0.8x0.95 smd: 1(-0.65,0) 2(0.65,0)
  silkscreen extent -0.2,-0.7 0.2,0.7, body extent -0.82,-0.48 0.82,0.48, height 0.5
SOT-23-OT5_M [mm] "SOT23, 5-Leads, Body 2.9x1.7mm, Pitch 0.95mm, Lead Span 2.8mm, IPC Low Density"
  rect 1.3x0.7 smd: 1(-1.2,0.95) 2(-1.2,0) 3(-1.2,-0.95) 4(1.2,-0.95) 5(1.2,0.95)
  silkscreen extent -1.33,-1.55 0.15,1.97, body extent -0.9,-1.55 0.9,1.55, height 1.45
WL-SBCD_0606 [mm] "SMT Bi-color Chip LED Diffuesed, body 1.5x1.6mm"
  rect 0.5x0.8 smd: 1(-0.45,0.8) 2(-0.45,-0.8) 3(0.45,-0.8) 4(0.45,0.8)
  silkscreen extent -0.07,1.47 0.07,1.62, body extent -0.75,-0.8 0.75,0.8, height 0.55

## Part data
C1 C2 C3 C7 C8 C9 C10 C11 C12 C13 C14 C15 C16 C17 C18 C19 C20 C21 C22 C23 C24 C25 C27 C28 C29 C30: library part CMP-001-00058-1, "LARGE PADS, 0402 CAP, CHANGE COMMENT TO MATCH REAL P/N", Capacitor Type=Ceramic, Case/Package=0402, Max Operating Temperature=85°C, Min Operating Temperature=-55°C, Mounting Technology="Surface Mount", Pins=2, RoHS Compliant=Yes
C4 C5 C6 C26: library part CMP-2007-03222-3, "Chip Multilayer Ceramic Capacitors for General Purpose, 0805, 22uF, X5R, 15%, 20%, 25V", Capacitance=22uF, Case Code (Imperial)=0805, Case Code (Metric)=2012, Dielectric=X5R, Max Operating Temperature=85°C, Min Operating Temperature=-55°C, Package Quantity=3000, Resistor Type=Ceramic, Tolerance=20%, Voltage=25V, Case/Package=0805, Depth=1.25mm, Height=1.25mm, Lead Free="Lead Free", Length=2mm, Material=Ceramic, Mount="Surface Mount", Packaging="Tape and Reel", REACH SVHC="No SVHC", Termination=SMD/SMT, Thickness=0.057inch, Voltage Rating=25V, Voltage Rating (DC)=25V, Weight=0.000335oz, Width=1.25mm
D1: library part CMP-004-00040-2, "Led, Red/Grn, 180Mcd/230Mcd, 624Nm/525Nm Rohs Compliant: Yes", Component Type=Standard, Design Item ID=CMP-004-00034-2, Pins=4, Source=rgled.SchLib
D2: library part CMP-04989-000002-1, "4-CHANNEL LOW-CAPACITANCE SURGE", Ambient Temperature Range High=+125°C, Ambient Temperature Range Low=-40°C, Breakdown Voltage=5.5V, Capacitance=0.55pF, Clamping Voltage=11.5V, Manufacturer="Texas Instruments", Package=DQA0010A, Peak Pulse Current=5.5A, Peak Pulse Power=50W, Reverse Standoff Voltage=3.6V, Temperature="-40°C to +125°C", Automotive=No, Category=Diode, ComponentLink2Description=Datasheet, ComponentLink2URL=http://www.ti.com/lit/ds/symlink/esd204.pdf, Device Class L1="Circuit Protection", Device Class L2="TVS Diodes", Device Class L3=unset, Digikey Description="4-CHANNEL LOW-CAPACITANCE SURGE", Direction=Bidirectional, Height=0.55mm, Lead Free=Yes, Manufacturer Part Number=ESD204DQAR, Mouser Description="4-Channel Low-Capacitance Surge and ESD Protection Diode 10-USON -40 to 125", Number of Channels=4, Octopart=https://octopart.com/esd204dqar-texas+instruments-89917476, RoHS=TRUE, Standoff Height=0mm, Temperature Range High=+125°C, Temperature Range Low=-40°C
F1: library part CMP-08606-000071-1, "PTC RESET FUSE 60V 500MA 2920", Case Code (Imperial)=2920, Case Code (Metric)=7351, Current Rating=10A, Hold Current=500mA, Max Operating Temperature=85°C, Max Voltage Rating (DC)=60V, Min Operating Temperature=-40°C, Package Quantity=1500, Power Dissipation=1.5W, Resistance=1.4R, Trip Current=1A, Approvals=cULus, Case/Package=2920, Height=1.25mm, Lead Free="Lead Free", Length=7.98mm, Max Current Rating=10A, Operating Supply Voltage=60V, Packaging="Tape and Reel", REACH SVHC="No SVHC", RoHS Compliant=Yes, Series=2920L, Terminal Material=Copper, Termination=SMD/SMT, Time to Trip=4s, Voltage Rating=60V, Voltage Rating (DC)=60V, Width=5.44mm, Working Voltage=60V
J1: library part CMP-03368-000001-1, "CONN FPC VERT 15POS 1.00MM SMD", Current Rating=1A, Manufacturer=TE, Package=0, Temperature="-20°C to +85°C", Temperature Range High=+85°C, Temperature Range Low=-20°C, Voltage Rating=125V, Automotive=No, Category=Conn, ComponentLink2Description=Datasheet, ComponentLink2URL=https://www.te.com/commerce/DocumentDelivery/DDEController?Action=showdoc&DocId=Customer+Drawing%7F1734248%7FE1%7Fpdf%7FEnglish%7FENG_CD_1734248_E1__.pdf%7F1-1734248-5, Conn Gender=Female, Conn Orientation=Vertical, Contact Material=Gold,Nickel, Device Class L1=Connectors, Device Class L2="FFC / FPC", Device Class L3=unset, Digikey Description="CONN FPC VERT 15POS 1.00MM SMD", Height=8mm, Is Female=yes, Lead Free=Yes, Manufacturer Part Number=1-1734248-5, Mounting Type="Surface Mount", Mouser Description="FFC & FPC Connectors 15P 1.0 FPC, Zip V/T SMT", Number of Contacts=15, Octopart=https://octopart.com/1-1734248-5-te+connectivity-40620898, Pitch=1mm, RoHS=TRUE
J2: library part CMP-002-00054-1, "RF F Connector, Male, Board Mount, Solder Terminal, Plug", Connector Type="RF F CONNECTOR", Mounting Technology=Board, RoHS Compliant=Yes
L1: library part CMP-06042-015002-1, "Wire Wound Ferrite Inductor for Power Lines 4.7μH ±30% 0.216Ω 1000mA 1210", Case Code (Imperial)=1210, Case Code (Metric)=3225, Current Rating=1A, DC Resistance (DCR)=180mR, Inductance=4.7uH, Inductance Tolerance=30%, Max Operating Temperature=85°C, Min Operating Temperature=-40°C, Package Quantity=2000, Resistor Type=Wirewound, Self Resonant Frequency=40MHz, Test Frequency=1MHz, Case/Package=1210, Core Material=Ferrite, DC Current=1A, Depth=2.8mm, Height=2mm, Height - Seated (Max)=0.067inch, Lead Free="Lead Free", Length=3.2mm, Max DC Current=1A, Military Standard=Not, Mount="Surface Mount", Packaging="Tape and Reel", Radiation Hardening=No, REACH SVHC="No SVHC", Saturation Current=1A, Shielding=Shielded, Termination=SMD/SMT, Tolerance=30%, Weight=0.001552oz, Width=0.098inch
L2: library part CMP-11268-000041-1, "NOT COILCRAFT - ACTUAL P# --> ADL32VHC-220M /  - Power Injection Chokes for PoC", Ambient Temperature Range High=+125°C, Ambient Temperature Range Low=-40°C, Inductance=22uH, Manufacturer=coilcraft, Manufacturer Part Number=1210POC-223MRC, Package=1210POC, Rms Current=700mA, Saturation Current=720mA, Self Resonant Frequency=70MHz, Series Resistance=0.88Ω, Test Frequency=100kHz, Tolerance=20%, Automotive=Yes, Automotive Grade="Grade 1", Category=Ind, ComponentLink2Description=Datasheet, ComponentLink2URL=https://drive.google.com/open?id=15FlOq8Y4YbRFohfA_cJ40jgnqs8va2Mh, Core Material=Ferrite, Device Class L1="Passive Components", Device Class L2=Inductors, Device Class L3="Fixed Inductors", Height=3mm, Lead Free=Yes, Octopart=https://octopart.com/1210poc-223mrc-coilcraft-103207315, RoHS=TRUE
L3: library part CMP-11268-000007-1, "Fixed Inductors PFL1609 Low Profile 0.56 uH 20 % 1.4 A", Ambient Temperature Range High=+105°C, Ambient Temperature Range Low=-40°C, Inductance=0.56uH, Manufacturer=coilcraft, Package=PFL1609, Rms Current=1100mA, Saturation Current=710mA, Self Resonant Frequency=600MHz, Series Resistance=130mΩ, Test Frequency=7.9MHz, Tolerance=20%, Automotive=Yes, Automotive Grade="Grade 1", Category=Ind, ComponentLink2Description=Datasheet, ComponentLink2URL=https://www.coilcraft.com/pdfs/pfl1609.pdf, Composition=Wirewound, Core Material=Composite, Device Class L1="Passive Components", Device Class L2=Inductors, Device Class L3="Fixed Inductors", Height=0.95mm, Lead Free=Yes, Manufacturer Part Number=PFL1609-561MEW, Mouser Description="Fixed Inductors PFL1609 Low Profile 0.56 uH 20 % 1.4 A", Octopart=https://octopart.com/pfl1609-561mew-coilcraft-20329171, RoHS=TRUE, Shielding=true
Q1: library part CMP-2000-04939-1, "Dual N & P-Channel 2.5 V Specified PowerTrench(TM) MOSFET, -55 to 150 degC, 6-Pin SOT-23, RoHS, Tape and Reel", Manufacturer=Fairchild, Maximum Continuous Drain Current=2.7@NChannel, Maximum Drain Source Voltage=20V, Maximum Gate Source Voltage=±8V, Operating Temperature=-55to150degC, Package=6SuperSOT, Package Description="6-Pin Small Outline Transistor, Body 2.9 x 1.6 mm, Pitch 0.95 mm", Package Reference=SOT23-6, Package Version="Rev. 5, 05/2015", Category=MOSFET, Channel Mode=Enhancement, Channel Type=N, Datasheet URL=https://www.fairchildsemi.com/datasheets/FD/FDC6327C.pdf, Datasheet Version="Rev. E, 07/2000", Manufacturer URL=https://www.fairchildsemi.com/, Mounting=SurfaceMount, Package URL=https://www.fairchildsemi.com/package-drawings/MA/MA06A.pdf, Packaging=Tape&Reel, Rad Hard=No, RDS-on=80@4.5V@NChannel, Typical Fall Time=3@NChannel, Typical Rise Time=9@NChannel, Typical Turn-Off Delay Time=12@NChannel, Typical Turn-On Delay Time=5@NChannel
R1 R2 R3 R4 R5 R6 R7 R8 R9 R10 R11 R12 R13 R15 R16 R17 R18 R19 R20 R21 R22 R23 R24: library part CMP-009-00002-14, "Resistor"
U1: library part CMP-12757-000006-1, "IC REG BUCK 3.3V 2A TSOT26", Ambient Temperature Range High=+85°C, Ambient Temperature Range Low=-40°C, Manufacturer="Diodes Inc.", Max Junction Temp=+160°C, Max Supply Voltage=32V, Min Supply Voltage=3.8V, Nominal Supply Current=22uA, Output Current=2A, Output Voltage=3.3V, Package=TSOT26, Switching Frequency=1.1MHz, Temperature="to +160°C", Automotive=No, Category=IC, ComponentLink2Description=Datasheet, ComponentLink2URL=https://www.diodes.com/assets/Datasheets/AP63200-AP63201-AP63203-AP63205.pdf, Device Class L1="Integrated Circuits (ICs)", Device Class L2="Power Management ICs", Device Class L3="Voltage Regulators - Switching", Digikey Description="IC REG BUCK 3.3V 2A TSOT26", Footprint Url=https://www.diodes.com/assets/Package-Files/TSOT26.pdf, Height=1mm, Lead Free=Yes, Manufacturer Part Number=AP63203WU-7, Mouser Description="AP63203 Series 3.3 V 2 A SMT Fixed Low IQ Synchronous Buck - TSOT-26", Number of Outputs=1, Octopart=https://octopart.com/ap63203wu-7-diodes+inc.-98099550, Output Type=Fixed, RoHS=TRUE, Standoff Height=0.01mm, Switching Topology=Buck, Temperature Range High=+160°C
U2: library part CMP-015-00012-2, "3Gbps Serializer TQFN-32 Serializers / Deserializers ROHS"
U3: library part CMP-019-00042-1, "Fixed Positive LDO Regulator", RoHS Compliant=Yes
U4: library part CMP-0136-00731-1, "300 mA, High PSRR, Low Quiescent Current LDO, 5-Pin SOT-23, Industrial Temperature, Tape and Reel", Code_IPC=SOT23-5, DatasheetVersion="revB, Jan-2009", PackageDescription="5-Lead Plastic Small Outline Transistor (OT) [SOT-23]", PackageReference=SOT-23-OT5, PackageVersion="revBB, Aug-2009"
Y1: library part CMP-2000-05733-3, "Crystal 25MHz ±20ppm (Tol) ±30ppm (Stability) 18pF FUND 60Ω 4-Pin SMD T/R", Case/Package=CSMD, ESR (Equivalent Series Resistance)=60R, Frequency=25MHz, Frequency Stability=30ppm, Frequency Tolerance=20ppm, Load Capacitance=18pF, Max Operating Temperature=85°C, Min Operating Temperature=-40°C, Operating Frequency="25 MHz", Package Quantity=1000, Depth=2.5mm, Height=0.039inch, Lead Free="Lead Free", Length=3.2mm, Mount="Surface Mount", Number of Pins=4, Packaging="Tape and Reel", Radiation Hardening=No, Series=ABM8G, Series Resistance=60R, Termination=SMD/SMT, Tolerance=20ppm, Width=0.098inch

## Via types
v1: diameter 0.5, hole 0.3, Top Layer to Bottom Layer, tented both sides, 61 vias
v2: diameter 0.5, hole 0.3, Top Layer to Bottom Layer, 28 vias

## Nets (pads, with @x,y where several pads share a name; then routed paths per layer and width w, separated by ;. In a path a pad name is that pad's centre, name@x,y a point inside that pad or via, vN(x,y) a via of type N, cw(c..) or ccw(c..) an arc to the next point about the centre after c; other vN are vias at no path point)
1V2: C21.1 C22.1 C28.1 U2.15 U4.5 | length 28.6
  Top Layer w0.25: v1(13.25,20.5) 13.75,20 U2.15
  Layer 2 w0.5: v1(13.25,20.5) 13.25,20.043 13.543,19.75 28.45,19.75 31.5,16.7 v1(31.5,11.021)
  Bottom Layer w0.3: C21.1 C22.1
1V8: C19.1 C20.1 C27.1 R8.2 U2.11 U3.2 | length 42.9
  Top Layer w0.25: U2.11 15.75,20.2 16,20.45 v1(16,20.5)
  Layer 2 w0.2: v1(10,14.6) 9.5,15.1 9.5,19.707 10.793,21 15.581,21 16,20.581 v1(16,20.5)
  Layer 2 w0.5: v1(16,20.5) 28.6,20.5 32.25,16.85 v1(32.25,6.979)
  Bottom Layer w0.3: C19.1 C20.1
3V3: C1.1 C2.1 C5.2 C6.2 C17.1 C18.1 C29.1 C30.1 D1.2 J1.15 L1.2 Q1.2 R5.2 R7.2 R13.1 R15.2 R17.2 R21.2 R23.2 R24.2 U1.1 U2.16 U3.1 U4.1 U4.3 | length 113.7
  Top Layer w0.2: C6.2 31.978,17.348 32.402,17.348 32.698,17.052 32.698,16.302 33.25,15.75 34.75,15.75 35.699,16.699 35.699,19.8 35.949,20.05 U1.1 ; U4.1 35.95,11.3 35.367,11.3 35.25,11.417 35.25,12.633 35.367,12.75 36,12.75 v1(36.2,12.95)
  Top Layer w0.25: v1(11,20.5) 12.5,20.5 13.25,19.75 U2.16
  Top Layer w0.3: R21.2 20,12.65 v1(20.5,12.15) 21.55,11.1 21.75,11.1 R15.2 R17.2 ; v1(22,15.85) R23.2
  Top Layer w0.5: v2(21,3.5) v2(21,7.25)
  Top Layer w0.75: v1(29,17.826) 28.924,17.75 27.5,17.75 27,17.25 27,15 27.75,14.25 34.892,14.25 36.092,13.05 36.092,12.975 36.117,12.95 v1(36.2,12.95)
  Layer 1 w0.3: v1(23.8,27.05) 23.8,23.026 v1(29,17.826)
  Layer 2 w0.3: v1(20.5,12.15) 20.5,14.35 v1(22,15.85)
  Layer 2 w0.5: v1(11,20.5) 12.449,19.051 27.775,19.051 v1(29,17.826) ; v1(22,15.85) 27.024,15.85
  Layer 2 w1: v2(21,3.5) 21,9.826 27.024,15.85 v1(29,17.826) ; v1(35.9,7.8) 36.2,8.1 v1(36.2,12.95) v1@36.2,13.126
  Bottom Layer w0.25: v1(10,17.1) 10.729,17.829 C17.1
  Bottom Layer w0.3: C17.1 C18.1 ; v1(23.8,27.05) 25.85,27.05 26.05,26.85 26.05,26.4 Q1.2
  Bottom Layer w0.5: v2(21,3.5) 21.229,3.5 21.892,4.164 21.914,4.164 22,4.25 C2.1 ; v2(21,7.25) 21.229,7.479 C1.1
ADC0: R6.1 R10.2 U2.17 | length 4.5
  Top Layer w0.2: R10.2 R6.1 10.075,19.6 10.925,18.75 U2.17
ADC1: R7.1 R11.2 U2.21 | length 5.5
  Top Layer w0.2: R11.2 R7.1 10.775,18.4 11,18.175 11,17 11.25,16.75 U2.21
ADC2: R8.1 R12.2 U2.22 | length 4.2
  Top Layer w0.2: R12.2 R8.1 10.9,15.9 11.25,16.25 U2.22
CAM_nPWDN: J1.11 R5.1 U2.2 | length 19.5
  Top Layer w0.2: v2(17,3.5) J1.11@17,7.25 ; U2.2 18.169,15.75 18.419,15.5 v1(18.5,15.5)
  Bottom Layer w0.2: v2(17,3.5) 20.125,6.625 20.125,10.55 20.425,10.85 R5.1 ; v1(18.5,15.5) 18.5,14.731 18.25,14.481 18.25,12.995 20.095,11.15 20.125,11.15 R5.1@20.462,10.813
CAM_SCL: J1.13 R23.1 U2.6 | length 33.5
  Top Layer w0.2: U2.6 21.15,17.75 21.4,18 23.075,18 23.925,17.15 R23.1 24.3,16.85 24.75,16.85 25.3,16.3 25.3,3.7 23.1,1.5 20.375,1.5 19,2.875 19,3.5 J1.13@19,7.25
CAM_SDA: J1.14 R24.1 U2.5 | length 30.9
  Top Layer w0.2: U2.5 21.9,17.25 22.008,17.142 22.658,17.142 23.3,16.5 24.452,16.5 24.9,16.052 24.9,3.852 22.975,1.927 20.573,1.927 20.108,2.392 20.108,3.392 20,3.5 J1.14@20,7.25
CFG0: R15.1 R16.2 U2.3 | length 7.9
  Top Layer w0.2: U2.3 20.05,16.25 20.8,15.5 20.8,14 21.15,13.65 21.7,13.65 R16.2 R15.1
CFG1: R17.1 R19.2 U2.4 | length 10.1
  Top Layer w0.2: U2.4 20.25,16.75 21.169,15.831 21.169,14.231 21.4,14 23.275,14 23.925,13.35 R19.2 R17.1
CLK_N: C12.2 U2.28 | length 3.3
  Top Layer w0.152: U2.28 14.75,14.273 14.651,14.174 14.651,13.279 14.651,12.099 14.74,12.01 14.99,12.01 15.25,11.75 C12.2
CLK_P: C11.2 U2.27 | length 3.3
  Top Layer w0.152: C11.2 13.75,11.75 14.01,12.01 14.26,12.01 14.349,12.099 14.349,13.154 14.349,14.174 14.25,14.273 U2.27
CSI_CLK_N: C12.1 J1.8 | length 19.6
  Top Layer w0.152: J1.8@14,3.5 14,2.875 14.224,2.651 14.26,2.651 14.349,2.562 14.349,1.763 14.125,1.539 v2(14.125,1.5) ; v2(14.875,9.5) 14.875,9.539 14.651,9.763 14.651,10.021 14.651,10.401 14.74,10.49 14.99,10.49 15.25,10.75 C12.1
  Bottom Layer w0.152: v2(14.125,1.5) 14.125,1.539 14.349,1.763 14.349,2.015 14.349,2.091 13.895,2.091 13.895,2.751 14.349,2.751 14.349,3.061 14.349,3.128 14.349,3.292 14.26,3.381 13.641,3.381 13.464,3.558 13.464,4.468 13.641,4.645 15.466,4.645 15.466,5.305 14.615,5.305 14.349,5.571 14.349,5.925 14.349,6.301 16.05,8.002 16.05,9.7 15.709,10.041 14.74,10.041 14.651,9.952 14.651,9.763 14.875,9.539 v2(14.875,9.5)
CSI_CLK_P: C11.1 J1.9 | length 19.7
  Top Layer w0.152: C11.1 13.75,10.75 14.01,10.49 14.26,10.49 14.349,10.401 14.349,10.146 14.349,9.763 14.125,9.539 v2(14.125,9.5) ; v2(14.875,1.5) 14.875,1.539 14.651,1.763 14.651,2.562 14.74,2.651 14.776,2.651 15,2.875 J1.9@15,3.5
  Bottom Layer w0.152: v2(14.125,9.5) 14.125,9.539 14.349,9.763 14.349,10.077 14.615,10.343 15.834,10.343 15.952,10.226 16.352,9.825 16.352,7.877 14.651,6.176 14.651,5.925 14.651,5.696 14.74,5.607 15.591,5.607 15.768,5.43 15.768,4.52 15.591,4.343 13.766,4.343 13.766,3.683 14.385,3.683 14.651,3.417 14.651,3.128 14.651,1.763 14.875,1.539 v2(14.875,1.5)
CSI_D0_N: C8.1 J1.2 | length 19.7
  Top Layer w0.152: J1.2@8,3.5 8,2.875 8.224,2.651 8.26,2.651 8.349,2.562 8.349,1.763 8.125,1.539 v2(8.125,1.5) ; v2(11.375,9.5) 11.375,9.539 11.151,9.763 11.151,10.021 11.151,10.401 11.24,10.49 11.49,10.49 11.75,10.75 C8.1
  Bottom Layer w0.152: v2(8.125,1.5) 8.125,1.539 8.349,1.763 8.349,4.925 8.349,5.806 8.26,5.895 7.425,5.895 7.248,6.072 7.248,6.983 7.425,7.159 9.43,7.159 9.43,7.819 8.615,7.819 8.349,8.085 8.349,8.375 8.349,9.051 9.641,10.343 10.885,10.343 11.151,10.077 11.151,9.763 11.375,9.539 v2(11.375,9.5)
CSI_D0_P: C7.1 J1.3 | length 19.6
  Top Layer w0.152: v2(8.875,1.5) 8.875,1.539 8.651,1.763 8.651,2.562 8.74,2.651 8.776,2.651 9,2.875 J1.3@9,3.5 ; C7.1 10.25,10.75 10.51,10.49 10.76,10.49 10.849,10.401 10.849,10.146 10.849,9.763 10.625,9.539 v2(10.625,9.5)
  Bottom Layer w0.152: v2(8.875,1.5) 8.875,1.539 8.651,1.763 8.651,2.236 9.105,2.236 9.105,2.896 8.651,2.896 8.651,3.6 8.651,4.925 8.651,5.932 8.385,6.197 7.55,6.197 7.55,6.857 9.555,6.857 9.732,7.034 9.732,7.945 9.555,8.121 8.74,8.121 8.651,8.211 8.651,8.375 8.651,8.926 9.766,10.041 10.76,10.041 10.849,9.952 10.849,9.763 10.625,9.539 v2(10.625,9.5)
CSI_D1_N: C10.1 J1.5 | length 20.7
  Top Layer w0.152: J1.5@11,3.5 11,2.875 11.224,2.651 11.26,2.651 11.349,2.562 11.349,2.304 11.349,1.763 11.125,1.539 v2(11.125,1.5) ; v2(18.375,9.5) 18.375,9.539 18.151,9.763 18.151,10.021 18.151,10.401 18.24,10.49 18.49,10.49 18.75,10.75 C10.1
  Bottom Layer w0.152: v2(11.125,1.5) 11.125,1.539 11.349,1.763 11.349,7.301 12.55,8.502 12.55,10.077 14,11.527 16.701,11.527 18.151,10.077 18.151,9.763 18.375,9.539 v2(18.375,9.5)
CSI_D1_P: C9.1 J1.6 | length 20.6
  Top Layer w0.152: v2(11.875,1.5) 11.875,1.539 11.651,1.763 11.651,2.179 11.651,2.562 11.74,2.651 11.776,2.651 12,2.875 J1.6@12,3.5 ; C9.1 17.25,10.75 17.51,10.49 17.76,10.49 17.849,10.401 17.849,10.146 17.849,9.763 17.625,9.539 v2(17.625,9.5)
  Bottom Layer w0.152: v2(11.875,1.5) 11.875,1.539 11.651,1.763 11.651,2.236 12.105,2.236 12.105,2.896 11.651,2.896 11.651,3.85 11.651,7.176 12.852,8.377 12.852,9.952 14.125,11.225 16.576,11.225 17.849,9.952 17.849,9.763 17.625,9.539 v2(17.625,9.5)
DA0_N: C8.2 U2.26 | length 4.9
  Top Layer w0.152: C8.2 11.49,11.989 11.24,11.989 11.151,12.078 11.151,12.204 11.89,12.943 12.772,12.943 13.651,13.822 13.651,14.174 13.75,14.273 U2.26
DA0_P: C7.2 U2.25 | length 4.9
  Top Layer w0.152: C7.2 10.51,11.989 10.76,11.989 10.849,12.078 10.849,12.329 11.765,13.245 12.647,13.245 13.349,13.947 13.349,14.174 13.25,14.273 U2.25
DA1_N: C10.2 U2.30 | length 4.9
  Top Layer w0.152: U2.30 15.75,14.273 15.651,14.174 15.651,13.903 16.357,13.197 17.305,13.197 18.151,12.35 18.151,12.099 18.24,12.01 18.49,12.01 18.75,11.75 C10.2
DA1_P: C9.2 U2.29 | length 4.9
  Top Layer w0.152: U2.29 15.25,14.273 15.349,14.174 15.349,13.778 16.232,12.895 17.18,12.895 17.849,12.225 17.849,12.099 17.76,12.01 17.51,12.01 17.25,11.75 C9.2
GND: C1.2 C2.2 C4.1 C5.1 C6.1 C15.2 C16.2 C17.2 C18.2 C19.2 C20.2 C21.2 C22.2 C23.2 C24.2 C25.2 C26.2 C27.2 C28.2 C29.2 C30.2 D2.3 D2.8 J1.1 J1.4 J1.7 J1.10 J2.2 Q1.5 R3.2 R4.1 R10.1 R11.1 R12.1 R16.1 R18.1 R19.1 R20.1 U1.4 U2.33 U3.3 U4.2 Y1.2 Y1.4
  other v1: 3,3 27,3 30,3 39,3 28.5,6 3,9 4.5,12 24,14.65 3,15 39,15 29,15.25 30.25,15.25 13.9,15.9 15,15.9 16.1,15.9 29,16.174 13.9,17 15,17 16.1,17 13.9,18.1 15,18.1 16.1,18.1 3,21 11,22 13,22 3,27 39,27 25.25,30 37.5,30 40.5,30 39,33 34.5,36 37.5,36 40.5,36 3,39
  other v2: 7.625,1 9.375,1 10.625,1 12.375,1 13.625,1 15.375,1 10.125,9 11.875,9 13.625,9 15.375,9 17.125,9 18.875,9 8.25,21.75
LOCK: R1.2 U2.31 | length 18.7
  Top Layer w0.2: U2.31 16.26,14.59 16.26,14.042 16.583,13.719 17.281,13.719 17.5,13.5 18.25,13.5 v1(18.75,14)
  Bottom Layer w0.2: v1(18.75,14) 28.9,24.15 28.9,24.55 29.2,24.85 R1.2
nERRB: R9.1 U2.32 | length 13.7
  Top Layer w0.2: U2.32 17.15,14.6 v1(17.75,14)
  Bottom Layer w0.2: v1(17.75,14) 17.75,16 20.6,18.85 R9.1
NetC3_1: C3.1 U1.6 | length 2.6
  Top Layer w0.2: U1.6 34,19.951 C3.1
NetC3_2: C3.2 L1.1 U1.5 | length 4.3
  Top Layer w0.2: 32.75,20 32.75,19 33.199,18.551 33.199,16.786 33.463,16.521 C3.2
NetC14_2: C14.2 R18.2 | length 2.3
  Top Layer w0.2: R18.2 14.079,22.65 C14.2
NetC23_1: C23.1 C24.1 C25.1 U2.14 | length 4.2
  Top Layer w0.25: v1(14,20.5) 14,20.419 14.25,20.169 U2.14
  Bottom Layer w0.3: C24.1 C25.1 C23.1
NetC26_1: C26.1 F1.2 L2.1 R22.2 | length 8.9
  Top Layer w0.5: F1.2@4.5,25.5 4.674,25.674 C26.1 10.405,25.674 L2.1@10.48,25.599 ; L2.1 L2.1@10.48,25.599 ; R22.2@11.025,27.5 11.025,27.375 10.95,27.3 10.825,27.3 10.48,26.955 L2.1@10.48,25.599
NetD1_1: D1.1 R2.2
  other v1: 22.2,27.05
NetD1_3: D1.3 Q1.4 | length 1.9
  Bottom Layer w0.2: v1(23.8,27.95) 24.25,28.4 25.05,28.4 25.3,28.65 Q1.4
NetD1_4: D1.4 R4.2
  other v1: 22.2,27.95
NetL2_2: L2.2 L3.1 R22.1 | length 4.1
  Top Layer w0.5: R22.1@12.475,27.5 12.475,27.375 12.55,27.3 12.675,27.3 13.02,26.955 L2.2 L3.1
NetQ1_1: Q1.1 R1.1 R3.1 | length 3.3
  Bottom Layer w0.3: Q1.1 27.25,26.15 R1.1 R3.1
NetQ1_3: Q1.3 R9.2 R13.2 | length 3.9
  Bottom Layer w0.2: R9.2 21.987,25.337 23.737,25.337 R13.2 24.6,25.35 25.3,26.05 Q1.3
NetQ1_6: Q1.6 R2.1 | length 11.8
  Bottom Layer w0.2: R2.1 20.6,26.675 21.275,26 22.75,26 22.959,26.209 22.959,28.959 24.75,30.75 26,30.75 26.95,29.8 26.95,29.05 Q1.6
NetR20_2: R20.2 U2.10 | length 2.8
  Top Layer w0.2: U2.10 16.26,19.41 16.26,19.86 17.45,21.05 17.7,21.05 R20.2
NetR21_1: R21.1 U2.1 | length 2.8
  Top Layer w0.2: U2.1 18,14.65 R21.1
NetU2_18: U2.18
PoC_PWR: C4.2 F1.1 R6.2 U1.2 U1.3 | length 46.7
  Top Layer w0.2: v1(7.25,22.25) 8.55,22.25 9.6,21.2 9.7,21.2 R6.2
  Bottom Layer w1: v1(7.25,22.25) v1(7.25,23.75) 13.25,29.75 19.75,29.75 22.5,32.5 30.25,32.5 33.75,29 33.75,25.5 v1(37.5,21.75) v1(39,21.75)
  other v1: 38.25,21.75 7.25,23
PoC_TAP: C13.2 D2.1 D2.10 J2.1 L3.2 | length 12.9
  Top Layer w0.261: J2.1 15,30.707 ccw(c16.707,30.707) 15.5,29.5 cw(c14.293,28.293) 16,28.293 D2.1 D2.10 16,26.604 cw(c15.146,26.604) 15.75,26 ccw(c16.028,25.722) 15.635,25.722 L3.2 15.75,24.885 C13.2
SIO_N: C14.1 U2.13 | length 2.6
  Top Layer w0.13: C14.1 14.25,21.5 14.521,21.229 14.784,21.229 14.86,21.153 14.86,19.836 14.75,19.726 U2.13
SIO_P: C13.1 U2.12 | length 2.6
  Top Layer w0.13: U2.12 15.25,19.726 15.14,19.836 15.14,21.153 15.216,21.229 15.479,21.229 15.75,21.5 C13.1
X25_N: C16.1 U2.9 Y1.3 | length 9
  Top Layer w0.152: U2.9 16.75,19.273 16.795,19.228 17.014,19.228 18.186,20.4 18.9,20.4 19.224,20.724 19.401,20.901 19.911,20.901 20,20.99 C16.1 20.26,21.261 20.26,20.99 20.349,20.901 21.172,20.901 21.351,21.08 22.585,21.08 22.674,21.169 22.674,21.576 Y1.3
X25_P: C15.1 U2.8 Y1.1 | length 9.2
  Top Layer w0.152: U2.8 17.273,18.75 17.228,18.795 17.228,19.014 18.312,20.098 19.025,20.098 19.526,20.599 19.911,20.599 20,20.51 C15.1 20.26,20.239 20.26,20.51 20.349,20.599 21.297,20.599 21.476,20.778 23.072,20.778 23.85,20 Y1.1
pads on no net: D2.2 D2.4 D2.5 D2.6 D2.7 D2.9 J1.12 U2.7 U2.19 U2.20 U2.23 U2.24 U4.4

## Polygon pours and split planes (outlines as drawn)
GND on Top Layer "GND_L01_P011" (solid, remove dead copper, pour order 11): 0,3 0,39 cw(c3,39) 3,42 40,42 cw(c40,39) 43,39 43,3 cw(c40,3) 40,0 3,0 cw(c3,3)
PoC_PWR on Top Layer "POC_PWR_L01_P000" (solid, remove dead copper, pour order 0): 1,17.75 1,20 6,20 6,24.25 7.75,24.25 7.75,17.75
3V3 on Top Layer "3V3_L01_P009" (solid, remove dead copper, pour order 9): 30,19.25 32.75,19.25 32.75,17 27.75,17 27.75,22.25 30,22.25
1V8 on Top Layer "1V8_L01_P006" (solid, remove dead copper, pour order 6): 35,7 33.25,7 33.25,6.5 31.5,6.5 31.5,8.5 35,8.5
3V3 on Top Layer "3V3_L01_P005" (solid, remove dead copper, pour order 5): 35,7 36.75,7 36.75,6.5 38.5,6.5 38.5,8.5 35,8.5
1V2 on Top Layer "1V2_L01_P004" (solid, remove dead copper, pour order 4): 35,11.5 30.75,11.5 30.75,10.5 35,10.5
3V3 on Top Layer "3V3_L01_P003" (solid, remove dead copper, pour order 3): 35,11.5 39.25,11.5 39.25,10.5 35,10.5
PoC_PWR on Top Layer "POC_PWR_L01_P002" (solid, remove dead copper, pour order 2): 35.5,22.5 35.5,20.5 38,20.5 38,21 39.75,21 39.75,22.5
NetC3_2 on Top Layer "NETC3_2_L01_P001" (solid, remove dead copper, pour order 1): 30.5,22.25 30.5,19.75 33.25,19.75 33.25,20.5 34.5,20.5 34.5,21.5 33.25,21.5 33.25,22.25
GND on Layer 2 "GND_L03_P007" (solid, remove dead copper, pour order 7): 0,3 0,39 cw(c3,39) 3,42 40,42 cw(c40,39) 43,39 43,3 cw(c40,3) 40,0 3,0 cw(c3,3)
GND on Layer 1 "GND_L02_P010" (solid, remove dead copper, pour order 10): 0,3 0,39 cw(c3,39) 3,42 40,42 cw(c40,39) 43,39 43,3 cw(c40,3) 40,0 3,0 cw(c3,3)
GND on Bottom Layer "GND_L04_P008" (solid, remove dead copper, pour order 8): 0,3 0,39 cw(c3,39) 3,42 40,42 cw(c40,39) 43,39 43,3 cw(c40,3) 40,0 3,0 cw(c3,3)

## Silkscreen, mask and mechanical layers (free items; w line width, h text height)
Top Overlay:
  drawing of 41 lines, arcs and shapes, not listed
  text "MAX96717 EVAL" at 22.35,37.35 h1.5
  text "Project:" at 22.2,35.25 h0.75
  text "BRZ" at 29.15,35.15 h0.75
  text "Revision:" at 22.2,33.7 h0.75
  text "V2" at 29.15,33.65 h0.75
  text "Date:" at 22.2,32.2 h0.75
  text "29/04/2025" at 29.15,32.15 h0.75
  text "STAT" at 20.609,28.5 h0.75
  text "GR:LOCK / RD:ERRB" at 20,24.96 h0.5
  text "3V3 2A" at 32.599,18.468 h0.5
  text "CFG0" at 20.5,9.3 h0.5
  text "CFG1" at 23.25,9.3 h0.5
  text "1V2 300mA" at 32.609,9 h0.5
  text "1V8 300mA" at 32.599,3.468 h0.5
Mechanical 1:
  lines w0.15: 0,39 cw(c3,39) 3,42 40,42 cw(c40,39) 43,39 43,3 cw(c40,3) 40,0 3,0 cw(c3,3) 0,3 0,39 ; 0,39 0,39